# Altium PCB PCB1.PcbDoc
Units mil, origin at the board's own origin, x right, y up, seen from the top; angles counter-clockwise.
Board outline 3157.64 x 2047.03 mil, 2 copper layers (Top Layer, Bottom Layer); 97 components, 115 nets, 448 pads, 179 vias.
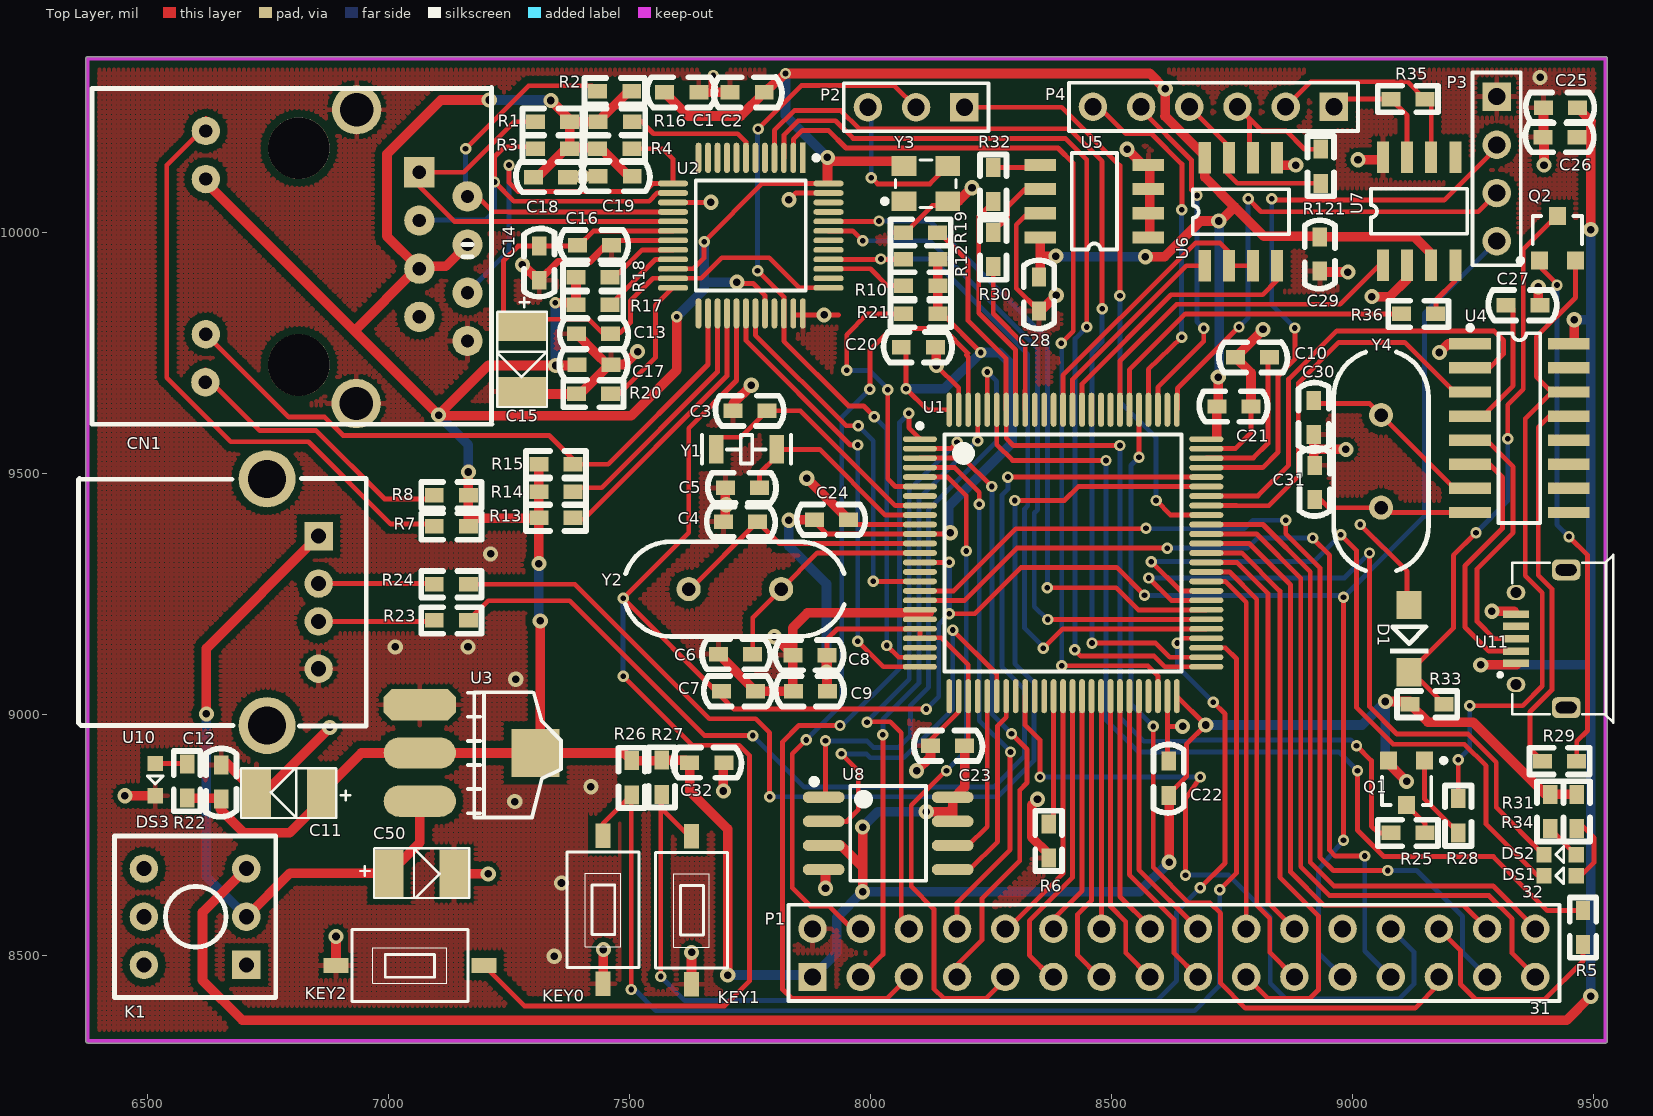
[diagram p0: Top Layer view]
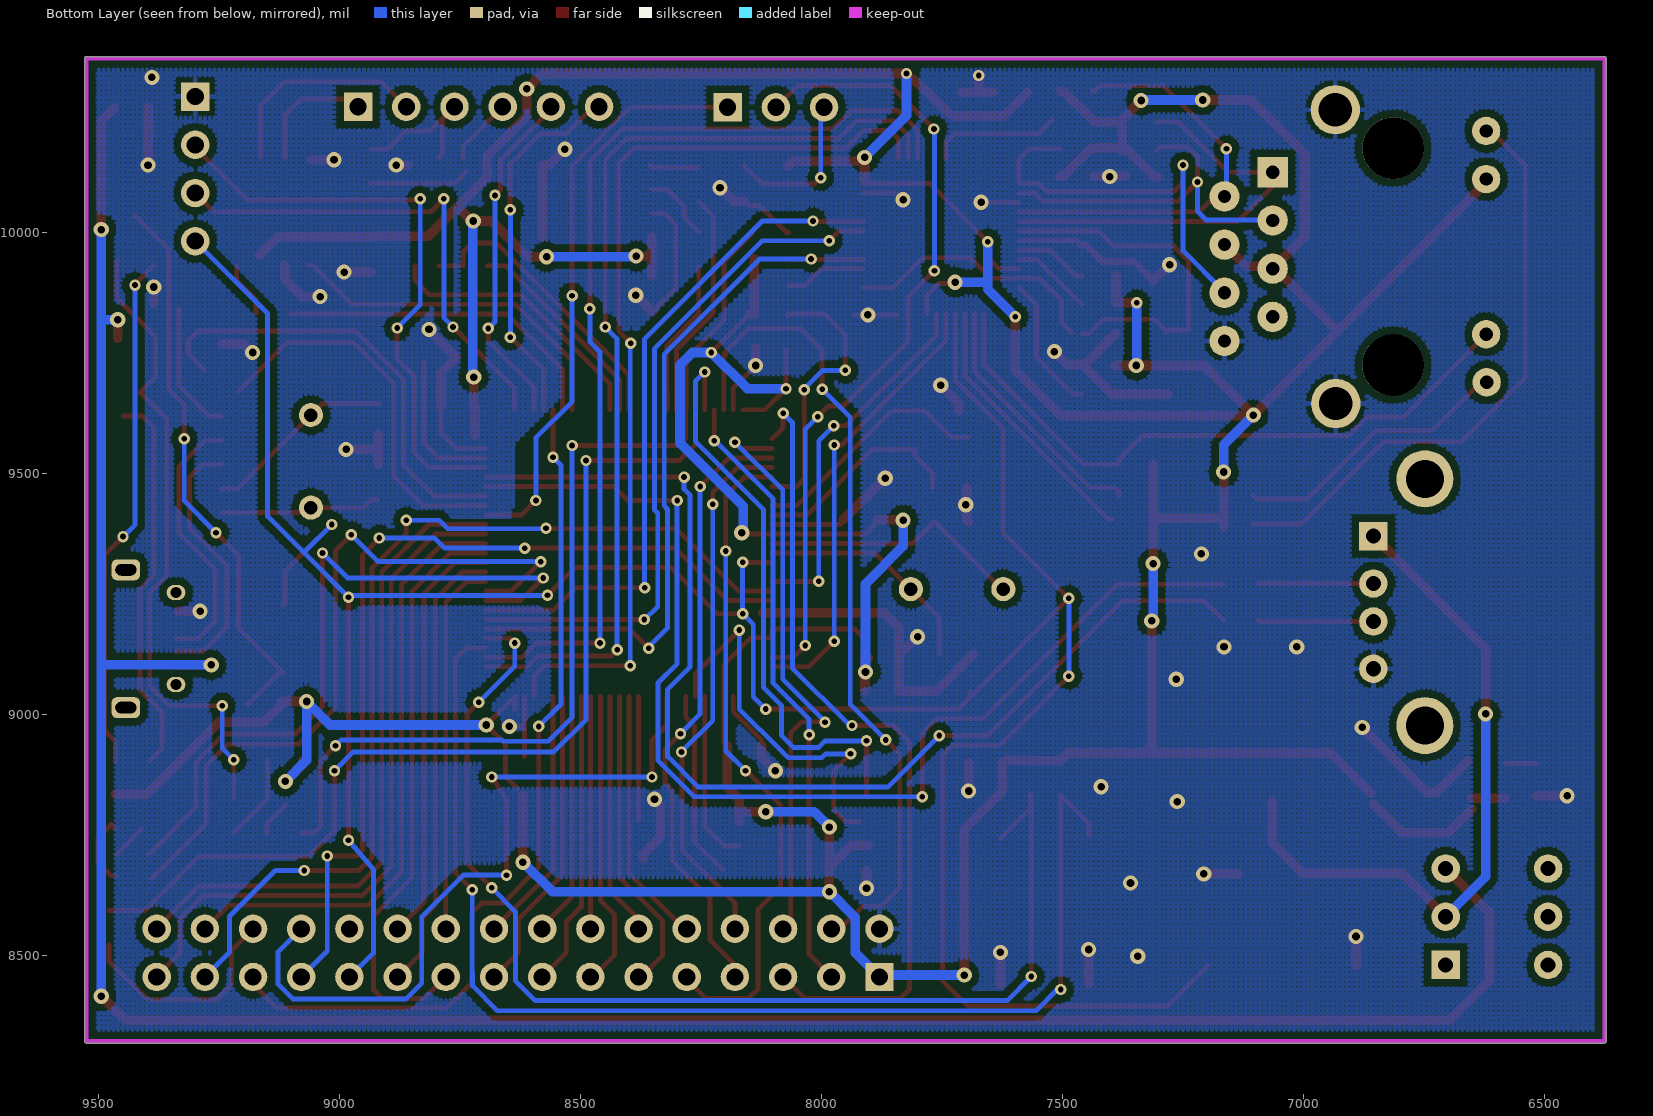
[diagram p1: Bottom Layer view, seen from below]

## Layer stack, top to bottom
Top Solder: solder mask 0.4, Solder Resist, Dk 3.5
Top Layer: signal copper 1.4
Dielectric 1: dielectric 12.6, FR-4, Dk 4.8
Bottom Layer: signal copper 1.4
Bottom Solder: solder mask 0.4, Solder Resist, Dk 3.5

## Board outline
6371.98,8322 6371.98,10358 cw(c6376,10358) 6372.28,10359.5 cw(c6376,10361) 6376,10365.01 9525.61,10365.01 cw(c9525.61,10361) 9529.62,10361 cw(c9525.61,10361) 9529.33,10359.5 cw(c9525.61,10358) 9529.62,10358 9529.62,8322 cw(c9525.61,8322) 9525.61,8317.99 6376,8317.99 cw(c6376,8322)

## Design rules (kind name [scope] priority, off if disabled: settings)
Clearance Clearance_GND [InPolygon] p1: gap=15
Clearance [All] p2: gap=10
PolygonConnect PolygonConnect_VIA [IsVia] p1: connectstyle=Direct reliefconductorwidth=10 reliefentries=4 polygonreliefangle="90 Angle" airgapwidth=10
PolygonConnect [All] p2: connectstyle=Relief reliefconductorwidth=10 reliefentries=4 polygonreliefangle="90 Angle" airgapwidth=10
RoomDefinition Sheet1 [InComponentClass('Sheet1')] p1: confinementstyle=ConfineIn formatcopy=TRUE lockcomponents=FALSE outline 0,0 2000,0 2000,1000 0,1000
RoutingVias [All] p1: holewidth=28 width=50 viastyle="Through Hole" minholewidth=28 minwidth=50 maxholewidth=28 maxwidth=50
SolderMaskExpansion [All] p1: expansion=4
UnpouredPolygon [All] p1: allowunpoured=FALSE
Width [All] p1: maxlimit=50 minlimit=8 preferedwidth=10
29 further rules are at their usual default settings.

## Components (designator, comment, footprint, x,y, rotation, side; value= is the part's Value field where it differs from the comment)
C1 "104" 0603C 7644,10291 r180 top
C2 "104" 0603C 7709,10291 r0 top
C3 "6pF" 0603C 7786,9630 r180 top
C4 "20pF" 0603C 7695,9400 r0 top
C5 "6pF" 0603C 7770,9470 r180 top
C6 "20pF" 0603C 7685,9125 r0 top
C7 "103p" 0603C 7762,9048 r180 top
C8 "104" 0603C 7910,9123 r180 top
C9 "104" 0603C 7911,9048 r180 top
C10 "2.2uF" 0603C 8758,9741 r0 top
C11 "10uF" 1206C 6861,8837 r180 top
C12 "104" 0603C 6653,8895 r270 top
C13 "104" 0603C 7390,9790 r0 top
C14 "103" 0603C 7313,9901 r90 top
C15 "106" 1206C 7277,9805 r270 top
C16 "104" 0603C 7463,9974 r180 top
C17 "104" 0603C 7462,9726 r180 top
C18 "104" 0603C 7372,10115 r180 top
C19 "106" 0603C 7435,10117 r0 top
C20 "104" 0603C 8135,9762 r180 top
C21 "104" 0603C 8790,9639 r180 top
C22 "104" 0603C 8619,8903 r270 top
C23 "104" 0603C 8125,8935 r0 top
C24 "104" 0603C 7955,9404 r180 top
C25 "104" 0603C 9468,10259 r180 top
C26 "104" 0603C 9467,10198 r180 top
C27 "104" 0603C 9390,9849 r180 top
C28 "104" 0603C 8350,9908 r270 top
C29 "104" 0603C 8933,9991 r270 top
C30 "22" 0603C 8920,9581 r90 top
C31 "22" 0603C 8922,9446 r90 top
C32 "104" 0603C 7625,8900 r0 top
C50 "Cap2" 1206C 7001,8670 r0 top
CN1 "J0011D21B" RJ45-12 6480,9919 r270 top
D1 "1N4148" DIODE_SOP 9118,9227 r270 top
DS1 "LED" SMDLED-0603 9465,8665 r180 top
DS2 "LED" SMDLED-0603 9465,8709 r180 top
DS3 "LED" SMDLED-0603 6516,8898 r270 top
K1 "BUTTON" BTN8.5*8.5 6705,8480 r180 top
KEY0 "KEY_M" KEY_SOP3625 7445,8441 r90 top
KEY1 "KEY_M" KEY_SOP3625 7629,8440 r90 top
KEY2 "KEY_M" KEY_SOP3625 6891,8479 r0 top
P1 "TFT" HDR2X16 7880,8455 r0 top
P2 "Header 3" HDR1X3 8195,10260 r180 top
P3 "SW" HDR1X4 9300,10282 r270 top
P4 "Header 6" HDR1X6 8962,10261 r180 top
Q1 "PNP S8550" SOT-23R 9113,8863 r180 top
Q2 "S8050" SOT-23R 9426,9983 r0 top
R1 "49R9" 0603R 7305,10230 r0 top
R2 "49R9" 0603R 7434,10293 r0 top
R3 "49R9" 0603R 7305,10174 r0 top
R4 "49R9" 0603R 7505,10174 r180 top
R5 "10K" 0603R 9479,8522 r90 top
R6 "10K" 0603R 8370,8702 r90 top
R7 "110R" 0603R 7095,9390 r0 top
R8 "110R" 0603R 7095,9455 r0 top
R10 "2K2" 0603R 8140,9890 r180 top
R12 "2K2" 0603R 8140,9945 r180 top
R13 "2K2" 0603R 7383,9408 r180 top
R14 "2K2" 0603R 7383,9462 r180 top
R15 "2K2" 0603R 7383,9519 r180 top
R16 "2K2" 0603R 7435,10230 r0 top
R17 "2K2" 0603R 7460,9850 r180 top
R18 "2K2" 0603R 7460,9907 r180 top
R19 "10K" 0603R 8069,10000 r0 top
R20 "4.87k" 0603R 7390,9665 r0 top
R21 "10K" 0603R 8140,9831 r180 top
R22 "330" 0603R 6582,8826 r90 top
R23 "22R" 0603R 7095,9195 r0 top
R24 "22R" 0603R 7095,9270 r0 top
R25 "1K" 0603R 9151,8754 r180 top
R26 "10K" 0603R 7505,8833 r90 top
R27 "10K" 0603R 7567,8834 r90 top
R28 "1K" 0603R 9220,8825 r270 top
R29 "1K" 0603R 9466,8903 r180 top
R30 "4.7K" 0603R 8255,10000 r270 top
R31 "1K" 0603R 9411,8834 r270 top
R32 "4.7K" 0603R 8255,10135 r270 top
R33 "10K" 0603R 9191,9021 r180 top
R34 "1K" 0603R 9466,8834 r270 top
R35 "120R" 0603R 9151,10277 r180 top
R36 "0R" 0603R 9102,9831 r0 top
R121 "120R" 0603R 8935,10173 r270 top
U1 "STM32F107VCT6" LQFP100_N 8400,9335 r0 top locked
U2 "DP83848CVV" LQFP48 7860,10155 r0 top
U3 "AMS1117-3.3" AMS1117 7065,9020 r270 top
U4 "CH340G" SOP16M 9347,9594 r270 top
U5 "24C02" SOP-8 8577,9990 r180 top
U6 "SP3485" SOP-8 8694,9931 r90 top
U7 "TJA1050" SOP-8 9064,9932 r90 top
U8 "W25Q256" LC-SOP-8_208mil 8037,8753 r270 top
U10 "USB-A-90" USB_2 6855,9370 r0 top
U11 "USB-B(Mini)" USB_AB 9444,9157 r270 top
Y1 "32.768KHz" XTAL3215 7680,9550 r0 top
Y2 "25MHz" XTAL_US 7815,9260 r180 top
Y3 "50Mhz" XTAL3225 8070,10065 r0 top
Y4 "12MHz" XTAL_US 9060,9429 r90 top

## Footprints (in the part's own frame and the unit in brackets; to place one, negate y for a bottom-side part, rotate by r counter-clockwise, add the part's x,y. Pads: shape width x height; smd on the part's side, far side on the other; paste and mask are expansions set on the pad)
0603C [mm]
  rect 1x0.762 smd: 1(0,0) 2(1.8,0)
  silkscreen extent -0.87,-0.8 2.73,0.8
0603R [mm]
  rect 1x0.762 smd: 1(0,0) 2(1.8,0)
  silkscreen extent -0.69,-0.7 2.49,0.7
1206C [mil]
  rect 60x100 smd: 1(0.13,-0.02) 2(135.13,-0.02)
  silkscreen extent -60,-51 167,52
AMS1117 [mil]
  oct 65x150 smd: 1(0.03,-0.06)
  oval 65x150 smd: 2(100.03,-0.06) 3(200.03,-0.06)
  rect 100x100 smd: 4(100.03,239.94)
  silkscreen extent -26,100 234,293
BTN8.5*8.5 [mm]
  rect 1.5x1.5 hole 0.8: 1(0,0)
  round 1.5 hole 0.8: 2(0,-2.54) 3(0,-5.08) 4(5.4,-5.08) 5(5.4,-2.54) 6(5.4,0)
  silkscreen extent -1.55,-6.79 6.95,1.71
DIODE_SOP [mm]
  rect 1.5x1.3 smd: 1(0,0) 2(3.556,0)
  silkscreen extent 1.14,-1.02 2.56,1.02
HDR1X3 [mm] "Connector; Header; 3 Position"
  rect 1.5x1.5 hole 0.9: 1(0,0)
  round 1.5 hole 0.9: 2(2.54,0) 3(5.08,0)
  silkscreen extent -1.27,-1.27 6.35,1.27
HDR1X4 [mm] "Connector; Header; 4 Position"
  rect 1.5x1.5 hole 0.9: 1(0,0)
  round 1.5 hole 0.9: 2(2.54,0) 3(5.08,0) 4(7.62,0)
  silkscreen extent -1.27,-1.27 8.89,1.27
HDR1X6 [mm] "Connector; Header; 6 Position"
  rect 1.5x1.5 hole 0.9: 1(0,0)
  round 1.5 hole 0.9: 2(2.54,0) 3(5.08,0) 4(7.62,0) 5(10.16,0) 6(12.7,0)
  silkscreen extent -1.27,-1.27 13.97,1.27
HDR2X16 [mm] "Connector; Header; 16x2 Position"
  rect 1.5x1.5 hole 0.9: 1(0,0)
  round 1.5 hole 0.9: 2(0,2.54) 3(2.54,0) 4(2.54,2.54) 5(5.08,0) 6(5.08,2.54) 7(7.62,0) 8(7.62,2.54) 9(10.16,0) 10(10.16,2.54) 11(12.7,0) 12(12.7,2.54) 13(15.24,0) 14(15.24,2.54) 15(17.78,0) 16(17.78,2.54) 17(20.32,0) 18(20.32,2.54) 19(22.86,0) 20(22.86,2.54) 21(25.4,0) 22(25.4,2.54) 23(27.94,0) 24(27.94,2.54) 25(30.48,0) 26(30.48,2.54) 27(33.02,0) 28(33.02,2.54) 29(35.56,0) 30(35.56,2.54) 31(38.1,0) 32(38.1,2.54)
  silkscreen extent -1.27,-1.27 39.37,3.81
KEY_SOP3625 [mm]
  rect 1.3x0.8 smd: 1(0,0) 2(7.8,0)
  silkscreen extent 0.85,-1.9 6.95,1.9
LC-SOP-8_208mil [mm]
  oval 0.6x2.2 smd: 1(-1.905,-3.4) 2(-0.635,-3.4) 3(0.635,-3.4) 4(1.905,-3.4) 5(1.905,3.4) 6(0.635,3.4) 7(-0.635,3.4) 8(-1.905,3.4)
  silkscreen extent -2.88,-4.05 2.5,2
LQFP48 [mm]
  rect 0.3x1.6 smd: 1(0,0)
  oval 0.3x1.6 smd: 2(-0.5,0) 3(-1,0) 4(-1.5,0) 5(-2,0) 6(-2.5,0) 7(-3,0) 8(-3.5,0) 9(-4,0) 10(-4.5,0) 11(-5,0) 12(-5.5,0) 25(-5.5,-8.2) 26(-5,-8.2) 27(-4.5,-8.2) 28(-4,-8.2) 29(-3.5,-8.2) 30(-3,-8.2) 31(-2.5,-8.2) 32(-2,-8.2) 33(-1.5,-8.2) 34(-1,-8.2) 35(-0.5,-8.2) 36(0,-8.2)
  oval 1.6x0.3 smd: 13(-6.85,-1.35) 14(-6.85,-1.85) 15(-6.85,-2.35) 16(-6.85,-2.85) 17(-6.85,-3.35) 18(-6.85,-3.85) 19(-6.85,-4.35) 20(-6.85,-4.85) 21(-6.85,-5.35) 22(-6.85,-5.85) 23(-6.85,-6.35) 24(-6.85,-6.85) 37(1.35,-6.85) 38(1.35,-6.35) 39(1.35,-5.85) 40(1.35,-5.35) 41(1.35,-4.85) 42(1.35,-4.35) 43(1.35,-3.85) 44(1.35,-3.35) 45(1.35,-2.85) 46(1.35,-2.35) 47(1.35,-1.85) 48(1.35,-1.35)
  silkscreen extent -5.65,-7 0.82,0.12
LQFP100_N [mm] "Thin QFP, 100-Leads, Body 14x14mm, Pitch 0.5mm, IPC Medium Density"
  oval 1.8x0.3 smd: 1(-7.55,6) 2(-7.55,5.5) 3(-7.55,5) 4(-7.55,4.5) 5(-7.55,4) 6(-7.55,3.5) 7(-7.55,3) 8(-7.55,2.5) 9(-7.55,2) 10(-7.55,1.5) 11(-7.55,1) 12(-7.55,0.5) 13(-7.55,0) 14(-7.55,-0.5) 15(-7.55,-1) 16(-7.55,-1.5) 17(-7.55,-2) 18(-7.55,-2.5) 19(-7.55,-3) 20(-7.55,-3.5) 21(-7.55,-4) 22(-7.55,-4.5) 23(-7.55,-5) 24(-7.55,-5.5) 25(-7.55,-6) 51(7.55,-6) 52(7.55,-5.5) 53(7.55,-5) 54(7.55,-4.5) 55(7.55,-4) 56(7.55,-3.5) 57(7.55,-3) 58(7.55,-2.5) 59(7.55,-2) 60(7.55,-1.5) 61(7.55,-1) 62(7.55,-0.5) 63(7.55,0) 64(7.55,0.5) 65(7.55,1) 66(7.55,1.5) 67(7.55,2) 68(7.55,2.5) 69(7.55,3) 70(7.55,3.5) 71(7.55,4) 72(7.55,4.5) 73(7.55,5) 74(7.55,5.5) 75(7.55,6)
  oval 0.3x1.8 smd: 26(-6,-7.55) 27(-5.5,-7.55) 28(-5,-7.55) 29(-4.5,-7.55) 30(-4,-7.55) 31(-3.5,-7.55) 32(-3,-7.55) 33(-2.5,-7.55) 34(-2,-7.55) 35(-1.5,-7.55) 36(-1,-7.55) 37(-0.5,-7.55) 38(0,-7.55) 39(0.5,-7.55) 40(1,-7.55) 41(1.5,-7.55) 42(2,-7.55) 43(2.5,-7.55) 44(3,-7.55) 45(3.5,-7.55) 46(4,-7.55) 47(4.5,-7.55) 48(5,-7.55) 49(5.5,-7.55) 50(6,-7.55) 76(6,7.55) 77(5.5,7.55) 78(5,7.55) 79(4.5,7.55) 80(4,7.55) 81(3.5,7.55) 82(3,7.55) 83(2.5,7.55) 84(2,7.55) 85(1.5,7.55) 86(1,7.55) 87(0.5,7.55) 88(0,7.55) 89(-0.5,7.55) 90(-1,7.55) 91(-1.5,7.55) 92(-2,7.55) 93(-2.5,7.55) 94(-3,7.55) 95(-3.5,7.55) 96(-4,7.55) 97(-4.5,7.55) 98(-5,7.55) 99(-5.5,7.55) 100(-6,7.55)
  silkscreen extent -7.67,-6.25 6.25,6.82, body extent -7,-7 7,7, height 1.6
RJ45-12 [mm]
  round 3.25 hole 3.25: 0(-6.502,8.484) 0(4.928,8.484)
  rect 1.6x1.6 hole 0.7: 1(-5.232,14.834)
  round 1.6 hole 0.7: 2(-3.962,17.374) 3(-2.692,14.834) 4(-1.422,17.374) 5(-0.152,14.834) 6(1.118,17.374) 7(2.388,14.834) 8(3.658,17.374)
  round 1.5 hole 0.7: 9(-7.412,3.581) 10(-4.877,3.581) 11(3.302,3.581) 12(5.838,3.556)
  round 2.6 hole 1.75: 13(-8.532,11.532) 14(6.958,11.506)
  silkscreen extent -9.7,-2.41 8.05,18.67
SMDLED-0603 [mil]
  rect 32x32 smd: 1(0,0) 2(66.93,0)
  silkscreen extent 26,-17 42,17
SOP16M [mm]
  rect 0.6x2.2 smd: 1(-4.445,-2.6) 2(-3.175,-2.6) 3(-1.905,-2.6) 4(-0.635,-2.6) 5(0.635,-2.6) 6(1.905,-2.6) 7(3.175,-2.6) 8(4.445,-2.6) 9(4.445,2.6) 10(3.175,2.6) 11(1.905,2.6) 12(0.635,2.6) 13(-0.635,2.6) 14(-1.905,2.6) 15(-3.175,2.6) 16(-4.445,2.6)
  silkscreen extent -5.42,-2.72 5,1.1
SOP-8 [mil]
  rect 65x25 smd: 1(0,0) 2(0,-50) 3(0,-100) 4(0,-150) 5(224.41,-150) 6(224.41,-100) 7(224.41,-50) 8(224.41,0)
  silkscreen extent 65,-175 159,25
SOT-23R [mm]
  rect 0.9x0.95 smd: 1(0.95,-1.048) 2(-0.95,-1.048) 3(0,1.302)
  silkscreen extent -2.07,-1.17 1.3,1.3
USB_2 [mm]
  round 3 hole 2: 0(-2.718,-9.986) 0(-2.718,3.018)
  rect 1.5x1.5 hole 0.8: 1(0,0)
  round 1.5 hole 0.8: 2(0,-2.5) 3(0,-4.5) 4(0,-6.989)
  silkscreen extent -12.65,-10.01 2.51,3.04
USB_AB [mm]
  rect 0.4x1.35 smd: 1(1.3,-2.642) 2(0.65,-2.642) 3(0,-2.642) 4(-0.65,-2.642) 5(-1.3,-2.642)
  oval 0.8x1 hole 0.6: 6(-2.438,-2.642) 9(2.413,-2.642)
  rrect50% 1.1x1.5 hole 0.6 slot 1.1 at 90 deg: 7(-3.632,0) 8(3.632,0)
  silkscreen extent -4.42,-3.58 4.42,2.49
XTAL3215 [mm]
  rect 0.75x1.5 smd: 1(0,0) 2(3.2,0)
  silkscreen extent -0.74,-0.75 3.94,0.75
XTAL3225 [mm]
  rect 1.3x1.05 smd: 1(0,0) 2(2.3,0) 3(2.3,1.85) 4(0,1.85)
  silkscreen extent -1.14,-0.33 2.74,2.17
XTAL_US [mil]
  round 50 hole 28: 1(0,0) 2(192.13,0)
  silkscreen extent -131,-98 323,98

## Part data
C1 C2 C3 C4 C5 C6 C7 C8 C9 C10 C12 C13 C14 C16 C17 C18 C19 C20 C21 C22 C23 C24 C25 C26 C27 C28 C29 C30 C31 C32: library part C
C11 C15: library part Cap2, "Capacitor"
C50: "Capacitor"
D1: library part D
P1: library part "Header 16X2", "Header, 16-Pin, Dual row"
P2: "Header, 3-Pin"
P3: library part "Header 4", "Header, 4-Pin"
P4: "Header, 6-Pin"
Q1: library part PNP, "8550/BCW68"
Q2: library part NPN, "8050/BCW846/BCW847"
R1 R2 R3 R4 R5 R6 R7 R8 R10 R12 R13 R14 R15 R16 R17 R18 R19 R20 R21 R22 R23 R24 R25 R26 R27 R28 R29 R30 R31 R32 R33 R34 R35 R36 R121: library part R
U1: library part STM32F103VBT6, "STM32 ARM-based 32-bit MCU with 64 Kbytes Flash, 100-pin LQFP, Industrial Temperature"
U3: library part AMS1117
U4: "USB2UART"
U5: library part 24C256, "EEPROM"
U6: library part MAX3485
U7: library part SN65HVD230D
U8: library part W25Q128, "W25Q128"
U10: library part USB_A_90
U11: library part USB5
Y1: library part XTAL, "普通晶振"
Y2 Y4: library part XTAL, "Crystal Oscillator"
Y3: library part XTAL_3225, "3225贴片无源晶振"

## Via types
v1: diameter 23.62, hole 11.81, Top Layer to Bottom Layer, 105 vias
v2: diameter 31.5, hole 15.75, Top Layer to Bottom Layer, 74 vias

## Nets (pads, with @x,y where several pads share a name; then routed paths per layer and width w, separated by ;. In a path a pad name is that pad's centre, name@x,y a point inside that pad or via, vN(x,y) a via of type N, cw(c..) or ccw(c..) an arc to the next point about the centre after c; other vN are vias at no path point)
3V3: C1.2 C2.2 C8.1 C9.1 C11.1 C12.2 C17.2 C18.2 C19.2 C20.2 C21.2 C22.2 C23.2 C24.2 C28.1 C29.1 C32.1 CN1.4 CN1.5 CN1.10 P1.1 Q1.1 R1.2 R2.2 R3.2 R4.2 R7.2 R8.2 R10.1 R12.1 R13.2 R14.2 R15.2 R16.1 R17.2 R18.2 R21.1 R22.1 R26.2 R27.2 R31.1 R33.2 R34.1 U1.11 U1.21 U1.22 U1.28 U1.50 U1.75 U1.100 U2.22 U2.32 U2.48 U3.2 U3.4 U5.8 U6.8 U7.3 U8.3 U8.7 U8.8 Y3.4 | length 15669.9
  Top Layer w10: U2.22 7632.32,9924.68 7655,9947.37 v1(7655,9981) 7775.85,10101.85 U2.48 ; v2(7723,9897) 7725.81,9894.19 7756.81,9894.19 7781.26,9869.74 U2.32 ; C24.2@7882,9403 7882,9402.13 7909.76,9374.37 U1.11 v2@8174.37,9374.37 ; C8.1@7910,9134 7910,9155.68 7931.52,9177.2 ; 7931.52,9177.52 U1.21 8102.76,9159.06 8146.94,9159.06 8203.15,9102.85 U1.28 8203.15,8942.28 C23.2 ; C20.2@8074,9757 v1(8074,9676) 8117.76,9632.24 U1.100 ; R21.1@8149.25,9831 v1(8229.25,9751) ; C22.2@8631.05,8845.53 8656,8870.48 8656,8938 v2(8696,8978) U1.50 U1.50@8636.22,9009.65
  Top Layer w20: R22.1 C12.2@6651.13,8826 ; CN1.10@6621,10104 6929,9796 ; 6651,8803 6700,8754 6795,8754 C11.1@6854.97,8813.97 ; C11.1 6943.82,8919.97 U3.2 U3.4 ; CN1.5@7064,9926 CN1.5@7081,9926 ; CN1.4 7119,9930 CN1.5@7059,9930 ; R7.2 R8.2 v2(7165.87,9503) ; 7176.54,9407 R13.2@7312.13,9407 ; v2(7209,10275) 7109,10275 6997,10163 6997,9992 CN1.5@7059,9930 ; C18.2 7309.03,10115 7368.03,10174 R3.2@7371.87,10174 ; v2(7312.13,9312.87) R13.2@7312.13,9407 ; R13.2 R13.2@7312.13,9407 ; R13.2@7312.13,9416 R14.2 R15.2 ; v2(7315,9194) 7315,8938.03 7319,8934.03 U3.4 ; v2(7337,10274) 7375.87,10235.13 R1.2 ; v1(7346,9854) 7389.13,9854 R18.2@7389.13,9910 ; v2(7346.98,9724) 7207,9724 v2(7104,9621) ; v2@7348.98,9724 C17.2@7391.13,9724 ; R4.2@7430.13,10176 R3.2@7375.87,10176 ; R4.2 7441,10174 7498,10117 C19.2 ; R2.2 7498,10293 R16.1 R1.2 ; R27.2@7566,8903.87 R26.2 7488.9,8919.97 U3.4 ; R27.2 7617.13,8904.87 C32.1@7623.5,8898.5 ; C1.2 7622.13,10242 7730.87,10242 C2.2 v1(7824,10330) 8580,10330 v2(8612,10298) 8612,10241.9 8611.53,10241.43 8694,10158.96 U6.8 8694,10115.01 8756.01,10053.01 ; v1(7598,9825) 7598,9714 7503.87,9619.87 7105.13,9619.87 v2(7104,9621) ; C32.1 7625,8841 7704,8762 v2(7704,8459) ; v2(7831,9403) 7832,9404 C24.2 ; U8.3 7939,8728 7984,8683 ; v2(7909,9088) 7909,9110 7903,9116 C8.1 C9.1@7910,9049 ; 7911,10110.22 7911,10140 ; v2(7911,10156) 7911,10140 ; v2(7984,8632) 7984,8683 ; v2(7984,8766) 7984,8683 ; Y3.4 8059.83,10148 7919,10148 7911,10140 ; v2(8116,8798) 8163.86,8798 8167.86,8802 ; R12.1 R10.1 R21.1 R21.1@8149.25,9831 ; U8.7 8170.86,8823.86 8195.87,8848.87 C23.2 ; C28.1@8352.59,9910.59 8352.59,9951 ; U5.8 8352.59,9951 ; v2(8385,9951) 8352.59,9951 ; v2(8570.75,9949.75) 8610.51,9949.75 8684.76,10024 v2(8723,10024) 8727,10024 8756.01,10053.01 ; C22.2 8620,8831.13 v2(8620,8693) ; 8719.13,9578 C21.2 8722,9641.87 v2(8722,9700) ; C29.1@8932,9992 8817.01,9992 8756.01,10053.01 ; C29.1 9129,9991 U7.3@9166.5,9953.5 ; v2(9069,9026.75) 9120.13,9026.75 R33.2 9157.13,8984 9251.16,8984 9401.16,8834 R31.1 R34.1 ; Q1.1 9075.6,8898.4 v2(9113,8861) ; 6929,9796 v2(7104,9621) ; 6929,9796 7058,9925 CN1.5 CN1.5@7059,9930 ; R3.2@7371.87,10174 R3.2 7375.87,10170 R3.2@7371.87,10174 ; R3.2@7371.87,10174 7369.87,10176 R3.2@7375.87,10176 ; R3.2@7375.87,10176 R1.2
  Bottom Layer w10: CN1.5@7064,9909.24 CN1.5
  Bottom Layer w20: v2(7104,9621) 7165.87,9559.13 v2(7165.87,9503) ; v2(7209,10275) v2@7336,10275 ; v2(7312.13,9312.87) 7312.13,9196.87 v2(7315,9194) ; v2@7346,9724.98 v1(7346,9854) ; v1(7598,9825) 7655,9882 7655,9892 ; v1(7655,9981) 7655,9892 ; v2(7704,8459) 7876,8459 P1.1 7930.47,8505.47 7930.47,8578.47 v2(7984,8632) 8559,8632 v2(8620,8693) ; v2(7723,9897) 7660,9897 7655,9892 ; v1(7824,10330) 7824,10243 v2(7911,10156) ; v2(7831,9403) 7831,9349 7909,9271 v2(7909,9088) ; v2(7984,8766) 8016,8798 v2(8116,8798) ; v1(8074,9676) 8154.25,9676 v1(8229.25,9751) 8268,9751 8294,9725 8294,9563 8163,9432 8163,9380 v2(8166,9377) ; v2(8385,9951) 8386.25,9949.75 v2(8570.75,9949.75) ; v2(8696,8978) 9020.25,8978 v2(9069,9026.75) 9069,8905 v2(9113,8861) ; v2(8723,10024) 8723.81,10023.19 v2@8723.81,9700
5V: C25.1 C26.1 K1.3 U4.16 U11.1 | length 5435.8
  Top Layer w20: K1.3 6614,8589 6614,8448 6696.53,8365.47 9445.47,8365.47 v2(9495,8415) ; v2(9267,9102.82) U11.1@9341,9102.82 ; U4.16@9461,9780.64 v2(9461,9819) ; C25.1 9496,10231 9495,10230 v2(9495,10006)
  Bottom Layer w20: v2(9267,9102.82) 9492,9102.82 ; v2(9461,9819) 9495,9819 ; 9491.96,9105.78 9495,9105.82 ; v2(9495,8415) 9495,9105.82 ; v2(9495,10006) 9495,9819 ; 9495,9105.82 9495,9819
"485 DIR": U1.88 U6.2 U6.3 | length 616.2
  Top Layer w10: 8399.68,9671.97 8399.68,9703.57 8639.68,9943.57 8640,9943.57 8647.43,9951 8647.79,9951 8675.29,9978.5 8725.5,9978.5 8744,9960 U6.2 U6.3 ; U1.88 8400,9671.97
"485 RX": U1.87 U6.1 | length 434.7
  Top Layer w10: U1.87 8419.68,9695.28 ; 8420,9695.28 8655.72,9931 U6.1
"485 TX": U1.86 U6.4 | length 577.7
  Top Layer w10: U1.86 8439.37,9686.37 8624,9871 8814,9871 8844,9901 U6.4
485A: P4.3 R121.1 U6.6 | length 315.9
  Top Layer w10: P4.3@8762,10238 P4.3 8812,10211 8863,10211 8901,10173 R121.1 ; 8787,10236 8787,10162.41 U6.6
485B: P4.4 R121.2 U6.7 | length 347.1
  Top Layer w10: P4.4 8744,10179 U6.7 ; U6.7@8737.5,10126.5 8761.87,10102.13 R121.2
BOOT0: R19.2 R25.2 U1.94 | length 2064.9
  Top Layer w10: R19.2@8142.87,10000 8203,9939.87 8203,9817 8281.26,9738.74 U1.94@8281.26,9632.24 ; U1.94@8281.89,9663.05 U1.94 8281.89,9573.11 8297,9558 v1(8518,9558) ; v1(9009,8935) 9040,8904 9040,8768 9054,8754 R25.2
  Bottom Layer w10: v1(8518,9558) 8518,8994 8567.75,8944.25 8660.74,8944.25 8663.48,8947 8997,8947 v1(9009,8935)
"CAN RX": R36.1 U1.81 | length 694.9
  Top Layer w10: U1.81 8537.8,9714.8 8654,9831 R36.1
"CAN TX": U1.82 U7.1 | length 729.4
  Top Layer w10: U1.82 8518.11,9733.48 8635.63,9851 8975,9851 9056,9932 U7.1
CANH: P4.1 R35.2 U7.7 | length 259.4
  Top Layer w10: P4.1 8978,10277 R35.2 9114,10243.13 U7.7
CANL: P4.2 R35.1 U7.6 | length 451.4
  Top Layer w10: P4.2 8914,10313 9115,10313 R35.1 9164,10264 U7.6
"CH340 D+": U4.5 U11.3 | length 559.9
  Top Layer w10: U4.5 9279,9569 9334,9514 9334,9377 9259.25,9302.25 9259.25,9192.75 9295,9157 U11.3
"CH340 D-": U4.6 U11.2 | length 548.2
  Top Layer w10: U4.6 9285,9519 9312,9492 9312,9386 9234,9308 9234,9181.3 9283.89,9131.41 U11.2
FCS: U1.96 U8.1 | length 1225.6
  Top Layer w10: U8.1 7907,8831.86 v1(7907,8945) ; U1.96 v1(8242.52,9710.52)
  Bottom Layer w10: v1(7907,8945) 7993,8945 8006.81,8931.19 8058.19,8931.19 8083.57,8956.57 8083.57,9019 8120.81,9056.24 8120.81,9425.73 8262,9566.92 8262,9691.04 v1(8242.52,9710.52)
FMIOSI: U1.32 U8.5 | length 391.9
  Top Layer w10: U8.5@8205.5,8677.5 8264,8736 8264,8976 8281.89,8993.89 U1.32
FMISO: U1.31 U8.2 | length 809.7
  Top Layer w10: U8.2@7921,8778 7951.28,8778 7975,8801.72 7975,8883 v1(7940,8918) ; v1(8171,9175) 8262.2,9083.8 U1.31
  Bottom Layer w10: v1(7940,8918) 7991.72,8918 7999.72,8910 8069,8910 8126.19,8967.19 8127.11,8967.19 8171,9011.08 v1(8171,9175)
FSCK: U1.30 U8.6 | length 358
  Top Layer w10: U8.6@8171.86,8727 8202.52,8727 8242.52,8767 U1.30
GND: C1.1 C2.1 C3.2 C4.1 C5.2 C6.1 C7.1 C8.2 C9.2 C10.1 C11.2 C12.1 C13.1 C14.1 C15.2 C16.1 C17.1 C18.1 C19.1 C20.1 C21.1 C22.1 C23.1 C24.1 C25.2 C26.2 C27.1 C28.2 C29.2 C30.1 C31.2 C32.2 C50.2 CN1.8 CN1.13 CN1.14 DS3.2 KEY0.1 KEY1.1 KEY2.1 P1.2 P3.1 R6.1 R19.1 R20.1 U1.10 U1.19 U1.20 U1.27 U1.49 U1.74 U1.99 U2.15 U2.19 U2.35 U2.36 U2.47 U3.1 U4.1 U5.1 U5.2 U5.3 U5.4 U5.7 U6.5 U7.2 U7.8 U8.4 U10.4 U11.5 Y3.2 | length 5249.9
  Top Layer w10: C50.2 C50.2@7137.11,8669 ; C16.1@7469,9983.74 U2.19 ; U2.15 v2@7668.48,10062.48 ; v2(7831,10068) 7845.16,10082.16 U2.47 ; C9.2@7839.13,9049 C9.2 ; U2.35@7844.7,9829 v2(7904,9829) 7934,9829 ; C24.1@7960.94,9394.06 U1.10 ; R19.1 8072.47,10000 8128.47,10056 8151.55,10056 Y3.2 ; C23.1@8125,8947 8183.46,9005.46 U1.27 ; v2(8137,9724) 8183.46,9677.54 U1.99 ; C28.2 8303,9884.13 8303,10016 8327,10040 U5.7 ; C22.1@8616.54,8912 8616.54,8978 ; U1.49 8616.54,8978 ; v2(8648,8975) 8619.54,8975 8616.54,8978 ; U1.74 8757.54,9551.54 8790,9584 C21.1
  Top Layer w15: C14.1 7352,9940 7417.57,9940 7451.57,9974 C16.1
  Top Layer w20: v2(6453,8831) 6453.07,8831.07 DS3.2 ; C12.1@6658.94,8903.94 C11.2 6743.02,8837.02 v2@6878.5,8972.5 ; KEY2.1 v2(6891,8539) ; C50.2@7137.11,8669 v2(7207,8669) v2@7206.02,8669.98 ; v2(7278,9933) 7279,9933 C14.1@7312,9900 ; C15.2@7281.85,9665 R20.1 7397.9,9665 7458.9,9726 C17.1 7490,9726 v2(7517,9753) ; C18.1@7370,10117 C19.1 ; C13.1 7390.1,9790 7430.82,9749.28 7430.82,9749.18 C17.1@7454,9726 ; KEY0.1@7446,8442 v2(7446,8512) ; KEY1.1 v2(7629,8506) ; C1.1 C2.1 ; v1@7673,10325 v1(7674,10326) 7674,10293 ; C6.1 C7.1 C9.2 ; v2(7695,8841) C32.2@7695,8899.13 ; C4.1 7699.13,9404.13 C5.2 ; C3.2 7715.13,9645.13 v2(7753,9683) ; v2(7801,9161.13) C8.2 ; C9.2@7839.13,9049 C8.2 ; v2(7868,9490) 7869,9490 C24.1 ; v2(7907,8639) U8.4@7907,8674.14 ; v2(8096,8883) 8125,8912 C23.1 ; 8122,9210.67 7869.67,9210.67 7839.13,9180.13 C8.2 ; v2(8137,9724) C20.1@8137,9760 ; Y3.2 8183,10065 v2(8211,10093) ; v2(8347,8824) 8335,8812 8335,8744.9 8370,8709.9 R6.1 ; C28.2 8353.13,9837.13 v2(8386,9870) ; v2(8533,10173) 8566,10140 U5.4 ; U5.1@8580,9990 U5.4@8580,10140 ; C21.1 8790,9709 C10.1 v2@8815,9798 ; 8859.41,10140 v2(8883,10140) ; C31.2@8920,9518.87 C30.1 ; 8922,9550 v2(8987,9550) ; C29.2@8935.13,9918 v2(8991,9918) ; v2(9012,10151) U7.8@9058.59,10151 ; v2(9041,9867) 9078,9867 9114,9903 U7.2 ; v2(9181,9751) 9199,9769 U4.1 ; v2(9290,9214) U11.5@9336.46,9214 ; C27.1@9386,9853 v2(9386,9887) ; C26.2@9397.13,10199 C25.2 ; v2(9398,10140) C26.2@9398,10196.13
  other v2: 7344,8498 7359,8650 7262,8819 7420,8850 6878,8973 7264,9073 7014,9140 7165,9140 7212,9333 7701,9435 8815,9799 7669,10063 7402,10116 9390,10322
"IIC SCL": R30.2 U1.92 | length 324.5
  Top Layer w10: R30.2 8255,9832 8321.57,9765.43 8321.57,9671.97 ; U1.92 8321.26,9671.97
"IIC SDA": R32.2 U1.93 | length 475.9
  Top Layer w10: R32.2 8225,10034.13 8225,9833 8301.26,9756.74 U1.93@8301.26,9632.24
KEY1: KEY0.2 R26.1 U1.53 | length 2539
  Top Layer w10: KEY0.2 7445,8773 R26.1@7504,8832 ; v1(7504,8429) R26.1@7504,8832 ; R26.1 R26.1@7504,8832 ; U1.53 8736.85,9138.15 8760,9115 8760,8671 v1(8725,8636)
  Bottom Layer w10: v1(7504,8429) 7511,8429 7555,8385 8672.97,8385 8724.53,8436.56 8724.53,8462.5 8725,8462.97 v1@8725,8635.53 ; v1@8724.53,8636 v1@8725,8635.53 ; v1(8725,8636) v1@8725,8635.53
KEY2: KEY1.2 R27.1 U1.54 | length 2454.8
  Top Layer w10: v1(7565,8456) 7565,8826 7568,8829 7565,8832 R27.1 7567,8804 KEY1.2@7629,8742 ; v1(8637,9148) 8646.83,9157.83 U1.54 ; v1(8685,8640) 8736,8691 8736,9001 v1(8711.5,9025.5)
  Bottom Layer w10: v1(7565,8456) 7615,8406 8593.97,8406 8635.47,8447.5 8635.47,8590.47 v1(8685,8640) ; v1(8637,9148) 8637,9100 v1(8711.5,9025.5)
LED1: DS2.2 U1.58 | length 1480.1
  Top Layer w10: v1(8578,9283) 8624.43,9236.57 U1.58 ; v1(9036,9335) 9036,9016 9093,8959 9240.81,8959 9299,8900.81 9299,8807 DS2.2@9397,8709
  Bottom Layer w10: v1(8578,9283) 8984,9283 v1(9036,9335)
LED2: DS1.2 U1.59 | length 1528.2
  Top Layer w10: v1(8583,9317) 8643.74,9256.26 U1.59 ; v1@8975,9372 v1(8976,9373) 9009.19,9339.81 9009.19,9013.81 9085.04,8937.96 9233.04,8937.96 9278,8893 9278,8772 DS1.2@9390,8660
  Bottom Layer w10: v1(8583,9317) 8920,9317 v1(8976,9373)
MCO: P2.1 U1.67 | length 1216
  Top Layer w10: P2.1 8397,10260 8518,10139 v1(8518,9869) ; v1(8593,9444) 8623.26,9413.74 U1.67
  Bottom Layer w10: v1(8518,9869) 8518,9649 8593,9574 v1(8593,9444)
"MII MDC": U1.16 U2.31 | length 769
  Top Layer w10: U2.31 7761.58,9787 7949.58,9599 v1(7975,9599) ; v1@8006.06,9275.94 U1.16
  Bottom Layer w10: v1(7975,9599) 8006,9568 v1(8006,9276)
"MII MDIO": U1.25 U2.30 | length 936
  Top Layer w10: U2.30 7741.89,9776 7958.89,9559 v1(7974,9559) ; v1(7974,9152) 8027.22,9098.78 U1.25
  Bottom Layer w10: v1(7974,9152) v1(7974,9559)
"MII RXCLK": P2.2 U1.24 U2.34 | length 1664.4
  Top Layer w10: v1(7766,9921) 7820.63,9866.37 U2.34 7820.63,9774.37 7955,9640 7986,9640 v1(8008,9618) ; v1(7767,10215) 7857,10305 8050,10305 P2.2 ; v1(8034,9143) 8058.54,9118.46 U1.24
  Bottom Layer w10: v1(7766,9921) 7766,10214 v1(7767,10215) ; v1(8008,9618) 8034,9592 v1(8034,9143)
"MII RXD0": U1.56 U2.43 | length 1441.3
  Top Layer w10: U2.43 7963.58,10003.42 v1(7984,9983) ; v1@8368,9197.2 U1.56
  Bottom Layer w10: v1(7984,9983) 8123,9983 8347,9759 8347,9424.8 8340.19,9417.99 8340.19,9223.81 8367,9197 v1(8368,9197)
"MII RXD1": U1.57 U2.44 | length 1421.8
  Top Layer w10: U2.44 v1@8017.11,10023.11 ; v1(8367,9263) 8510,9263 8556.11,9216.89 U1.57
  Bottom Layer w10: v1(8018,10024) 8123,10024 8368,9779 8368,9263 v1(8367,9263)
"MII RXDV": R12.2 U1.55 U2.40 | length 1526.1
  Top Layer w10: U2.40 R12.2@8068.5,9944.37 ; v1(8359,9137) 8399.52,9177.52 U1.55
  Bottom Layer w10: v1(8022,9945) 8129,9945 8326.81,9747.19 8326.81,9432.89 8320.19,9426.27 8320.19,9178.81 8359,9140 v1(8359,9137)
"MII TXD0": U1.51 U2.3 | length 2036.6
  Top Layer w10: U2.3 7820.63,10202.63 ; 7821,10203 7850,10232 7927.74,10232 7964.27,10195.47 8404.96,10195.47 8449,10151.43 v1(8449,9804) ; v1(8424,9134) 8437,9121 8589,9121 8611.22,9098.78 U1.51
  Bottom Layer w10: v1(8424,9134) 8425,9135 8425,9780 v1(8449,9804)
"MII TXD1": U1.52 U2.4 | length 2055.5
  Top Layer w10: U2.4 7800.95,10211.95 7842,10253 7939.03,10253 7976.56,10215.47 8413.24,10215.47 8481,10147.72 v1(8481,9842) ; v1(8460,9148) 8592,9148 8621.54,9118.46 U1.52
  Bottom Layer w10: v1(8460,9148) 8460,9752 8481,9773 v1(8481,9842)
"MII TXEN": U1.48 U2.2 | length 1957.7
  Top Layer w10: U2.2 7840.32,10193.32 7859,10212 7913,10212 7949.53,10175.47 8389.53,10175.47 8421,10144 8421,9795 v1(8396,9770) ; v1@8399,9101 8576,9101 8596.85,9080.15 U1.48
  Bottom Layer w10: v1(8396,9770) 8396.38,9770 8397.19,9769.19 v1(8397.19,9101.19)
NC: P1.24
NetC10_2: C10.2 U1.73 | length 311
  Top Layer w10: U1.73 8795,9531.85 ; 8795,9532.17 8825,9562.17 C10.2@8825,9733
NetC13_2: C13.2 C14.2 C15.1 C16.2 U2.18 U2.23 U2.37 | length 1313.4
  Top Layer w10: C15.1@7284.96,9797.87 7239,9797.87 7239,9942 7268.87,9971.87 C14.2 C16.2@7390.27,9971.87 ; C15.1@7284.98,9794.87 7310.11,9820 7415.9,9820 7445.9,9790 C13.2 ; C16.2@7392.13,9970 7425.56,10003.42 U2.18 ; 7481,9792 7502,9813 7502,9858 7549,9905 U2.23 7649,9905 7691.81,9947.81 7790.19,9947.81 7852.69,9885.31 U2.37
NetC27_2: C27.2 U4.4 | length 275.4
  Top Layer w10: U4.4 9270.97,9619 9334,9682.03 C27.2@9334,9842
NetC30_2: C30.2 U4.7 Y4.2 | length 400.5
  Top Layer w10: C30.2@8917,9645 9036.13,9645 9212.13,9469 U4.7
NetC31_1: C31.1 U4.8 Y4.1 | length 333.8
  Top Layer w10: C31.1 8934,9446 8951,9429 Y4.1 9070,9419 U4.8
NetC50_1: C50.1 K1.2 U3.3 U10.1 | length 1430.7
  Top Layer w20: v2(6622,9001) 6622,9137 U10.1 ; K1.2 6794.98,8669.98 C50.1 7064.94,8733.79 U3.3
  Bottom Layer w20: v2(6622,9001) 6622,8663 K1.2
NetCN1_1: CN1.1 R1.1 U2.17 | length 864.7
  Top Layer w10: CN1.1 7064,10096 7136.89,10023.11 U2.17 ; CN1.1@7064,10126 CN1.1@7064.5,10125.5 ; CN1.1@7070,10125 7156,10125 7261,10230 R1.1
NetCN1_2: CN1.2 R2.1 U2.16 | length 876
  Top Layer w10: v1(7160,10174) 7290.75,10304.75 7422.25,10304.75 R2.1 ; CN1.2 7184.11,10075 7216,10043.11 7249,10043.11 ; 7249,10042.8 7540,10042.8 U2.16 ; R2.1@7436,10293 R2.1@7438,10295
  Bottom Layer w10: v1(7160,10174) 7160,10079 CN1.2
NetCN1_3: CN1.3 R3.1 U2.14 | length 767.3
  Top Layer w10: R3.1@7305,10170 7297,10178 7241,10178 7220,10157 v1(7220,10105) 7260,10065 7527.2,10065 7541,10065 7558.16,10082.16 U2.14
  Bottom Layer w10: CN1.3@7064,10026 7201.67,10026 7220,10044.33 v1(7220,10105)
NetCN1_6: CN1.6 R4.1 U2.13 | length 835.8
  Top Layer w10: v1(7250,10140) 7250,10104 7269,10085 7532.3,10085 7549.15,10101.85 U2.13 7590.32,10152.68 7569,10174 R4.1
  Bottom Layer w10: CN1.6@7164,9876 7250,9962 v1(7250,10140)
NetCN1_9: CN1.9 R7.1 | length 1262.3
  Top Layer w10: CN1.9@6621,10236.83 6621,10221 6540,10140 6540,9699 6673,9566 6834,9566 7005,9395 R7.1@7105,9395
NetCN1_11: CN1.11 R15.1 U2.26 | length 1351.7
  Top Layer w10: CN1.11 6793,9617 6867.48,9617 6905.59,9578.9 7333.1,9578.9 7383,9529 R15.1 7456,9519 7663.15,9726.15 U2.26
NetCN1_12: CN1.12 R8.1 | length 614.4
  Top Layer w10: CN1.12@6625.17,9710 6620,9715.17 6620,9702 6733,9589 6850,9589 6992,9447 7097,9447 R8.1@7105,9455
NetD1_2: D1.2 Q2.3 R33.1 | length 1176.6
  Top Layer w10: R33.1 9125,9087 D1.2 9210,9179 9210,9330 v1(9257,9377) ; v1(9323,9572) 9323,9642.75 9354.88,9674.63 9354.88,9965.65 9423.49,10034.26 Q2.3
  Bottom Layer w10: v1(9257,9377) 9323,9443 v1(9323,9572)
NetDS1_1: DS1.1 R34.2 | length 150.7
  Top Layer w10: DS1.1 9474.21,8665 9502.07,8692.85 9502.07,8743.93 9474.43,8771.57 R34.2
NetDS2_1: DS2.1 R31.2 | length 76.9
  Top Layer w10: R31.2 9411,8762.24 9464.24,8709 DS2.1
NetDS3_1: DS3.1 R22.2 | length 64.9
  Top Layer w10: DS3.1 R22.2@6580.87,8898
NetP1_28: P1.28 R5.1 | length 468
  Top Layer w10: P1.28 9224.53,8510.47 9224.53,8440.47 9257,8408 9399,8408 9479,8488 R5.1
NetP2_3: P2.3 Y3.3 | length 328.1
  Top Layer w10: v1(8002,10114) 8015,10101 8123.72,10101 Y3.3
  Bottom Layer w10: P2.3 8002,10253 v1(8002,10114)
NetQ1_2: Q1.2 R28.2 | length 179
  Top Layer w10: Q1.2 9150.4,8823.73 R28.2
NetQ1_3: Q1.3 R25.1 | length 73.5
  Top Layer w10: Q1.3 9151,8773.74 R25.1
NetQ2_1: Q2.1 R28.1 U4.14 | length 1338.7
  Top Layer w10: R28.1 v1(9220,8906) ; v1(9244,9018) 9353.66,9018 9394.6,9058.94 9394.6,9252.11 9359,9287.72 9359,9614 9414,9669 9382,9701 9382,9783.48 9463.52,9865 9463.52,9939.63 Q2.1@9461.4,9941.74
  Bottom Layer w10: v1(9220,8906) 9244,8930 v1(9244,9018)
NetQ2_2: Q2.2 R29.1 | length 1081.3
  Top Layer w10: Q2.2@9386.6,9931.74 v1@9427.34,9891 ; v1(9450,9369) 9488.53,9330.47 9488.53,8966.53 9466,8944 R29.1
  Bottom Layer w10: v1(9425,9891) 9425,9394 v1(9450,9369)
NetR6_2: R6.2 U1.37 | length 257.8
  Top Layer w10: R6.2@8380.32,8780 U1.37
NetR10_2: R10.2 U2.39 | length 170.4
  Top Layer w10: U2.39 8000.32,9924.68 8035,9890 R10.2
NetR13_1: R13.1 U2.28 | length 559.4
  Top Layer w10: R13.1@7396,9405 7405,9405 7702.52,9702.52 U2.28
NetR14_1: R14.1 U2.27 | length 531.2
  Top Layer w10: R14.1@7383,9454 R14.1@7383,9461 ; R14.1 7391.5,9470.5 7442.5,9470.5 7682.84,9710.84 U2.27
NetR16_2: R16.2 U2.7 | length 274.4
  Top Layer w10: R16.2@7520,10235 7550,10205 7725,10205 7741.89,10188.11 U2.7
NetR17_1: R17.1 U2.21 | length 169.3
  Top Layer w10: R17.1 7554.05,9944.05 7554.53,9944.05 ; 7554.53,9944.37 U2.21
NetR18_1: R18.1 U2.20 | length 152.7
  Top Layer w10: R18.1@7460,9910 7472.95,9910 7527,9964.05 U2.20
NetR20_2: R20.2 U2.24 | length 284.6
  Top Layer w10: R20.2 7479,9665 7554,9740 7554,9849 U2.24
NetR21_2: R21.2 U1.6 | length 577
  Top Layer w10: v1(7951,9714) 7951,9788 7994,9831 R21.2 ; v1(8036,9674) 8036,9489 8052.2,9472.8 U1.6 ; R21.2@8071.13,9826.13 R21.2@8071.13,9831
  Bottom Layer w10: v1@7951,9713 v1(7951,9714) 7997.92,9714 8036,9675.92 v1(8036,9674)
NetR23_1: R23.1 U10.3 | length 250.9
  Top Layer w10: U10.3@6845,9192.83 7092.83,9192.83 R23.1
NetR24_1: R24.1 U10.2 | length 248.4
  Top Layer w10: U10.2@6845,9271.57 R24.1@7093.43,9271.57
NetR29_2: R29.2 U4.13 | length 807.4
  Top Layer w10: R29.2 9369,8929.13 9369,9005.05 9414.6,9050.65 9414.6,9260.4 9386,9289 9386,9596 9409,9619 U4.13
NetR30_1: R30.1 U5.6 | length 148.9
  Top Layer w10: R30.1 8255,10001.24 8285,10031.24 8285,10054 8321,10090 U5.6
NetR32_1: R32.1 U5.5 | length 102.7
  Top Layer w10: R32.1 8350.59,10135 U5.5@8355.59,10140
NetR36_2: R36.2 U7.4 | length 116.4
  Top Layer w10: R36.2@9174,9832.13 9174,9860 9214,9900 U7.4
NRST: C7.2 D1.1 KEY2.2 P1.23 P3.4 U1.14 U2.29 | length 6276.6
  Top Layer w10: KEY2.2 7282.09,8395 7698,8395 7741.5,8438.5 7749,8446 7749,8915 7728,8936 ; v1(7487,9079) 7630,8936 7728,8936 ; C7.2 C7.2@7691.13,9036.87 ; U2.29 7722.21,9692.97 7623,9593.76 7623,9377 v1(7487,9241) C7.2@7691.13,9036.87 ; 7741.5,8922.5 7728,8936 ; U1.14 8163.31,9315.32 v1(8164,9316) ; v1(8116,9011) 7717,9011 C7.2@7691.13,9036.87 ; v1(8164,9209) 8217,9209 8313,9305 8511,9305 v1(8569,9247) ; P1.23@8980,8449.72 P1.23 ; v1(8982,8739) v1(8982,9243) ; v1(9017,9394) 9114,9297 9114,9231 D1.1
  Bottom Layer w10: v1(7487,9079) v1(7487,9241) ; v1(8116,9011) 8142,9037 8142,9187 v1(8164,9209) v1(8164,9316) ; v1(8569,9247) 8978,9247 v1(8982,9243) 9073,9334 ; P1.23 8930,8505 8930,8678 v1(8982,8739) ; v1(9017,9394) 9073,9338 9073,9334 ; P3.4 9150,9832 9150,9411 9073,9334
"OSC32 IN": C3.1 U1.8 Y1.1 | length 512
  Top Layer w10: 7695,9575 7731,9575 C3.1 7855,9630 8051.57,9433.43 U1.8
"OSC32 OUT": C5.1 U1.9 Y1.2 | length 448.1
  Top Layer w10: C5.1 7770,9500 7805.98,9535.98 Y1.2 7895,9550 8031.26,9413.74 U1.9
"OSC IN": C4.2 U1.12 Y2.2 | length 556.6
  Top Layer w10: Y2.2 7625.87,9260 C4.2 7811.18,9354.68 U1.12
"OSC OUT": C6.2 U1.13 Y2.1 | length 478.3
  Top Layer w10: C6.2 7755.87,9200.87 Y2.1 7890,9335 U1.13
PB8: R5.2 U1.95 | length 2075.8
  Top Layer w10: U1.95 8262.2,9560 8295.2,9527 v1(8489,9527) ; v1(9011,8883) 9011,8760 9066,8705 9292.97,8705 9405.11,8592.87 R5.2
  Bottom Layer w10: v1@8489,9526 8489,8989 8556,8922 8972,8922 v1(9011,8883)
PC2: P1.29 U1.17 | length 2042.5
  Top Layer w10: U1.17 8173.26,9256.26 8302.19,9385.19 v1@8572.81,9385.19 ; v1(8862,9403) 8862,9375.28 8933.14,9304.14 8933.14,8703.86 8961,8676 v1(9074,8676)
  Bottom Layer w10: v1@8572.81,9385.19 8776.19,9385.19 8794,9403 v1(8862,9403) ; v1(9074,8676) 9134,8676 9229,8581 9229,8506 P1.29
  other v1: 8572,9386
PC3: P1.25 U1.18 | length 1879.7
  Top Layer w10: U1.18 8195.57,9236.57 8304,9345 v1(8616,9345) ; v1(8918,9366) 8918,9365 8953.14,9329.86 8953.14,8717.86 8965,8706 v1(9026,8706)
  Bottom Layer w10: v1@8619,9345 8782,9345 8803,9366 v1(8918,9366) ; v1(9026,8706) 9026,8509 P1.25
PC5: P1.26 U1.34 | length 1537.4
  Top Layer w10: U1.34 8321.26,8977.74 8352,8947 v1(8352,8870) ; v1(8654,8666) 8654,8822 8653,8823 v1(8685,8870)
  Bottom Layer w10: v1(8352,8870) v1(8685,8870) ; v1(8654,8666) 8654.81,8666.81 8743.19,8666.81 8830,8580 8830,8442 8863,8409 9096.97,8409 9128,8440.03 9128,8507 P1.26
PC6: P1.19 U1.63 | length 1232.9
  Top Layer w10: U1.63 8771,9335 8850,9256 8850,8662 8879.01,8632.99 ; P1.19 8824.53,8410.47 8912.47,8410.47 8930,8428 8930,8582 8871.5,8640.5
PC7: P1.30 U1.64 | length 1263.1
  Top Layer w10: U1.64 8786.32,9354.68 8872,9269 8872,8673 8941,8604 9231,8604 P1.30
PC8: P1.31 U1.65 | length 1457.2
  Top Layer w10: U1.65 8801.63,9374.37 8893.14,9282.86 8893.14,8683.86 8953,8624 9284,8624 9332,8576 9332,8504.28 9380,8456.28 P1.31
PC9: P1.32 U1.66 | length 1384.3
  Top Layer w10: U1.66 8814.94,9394.06 8913.14,9295.86 8913.14,8692.86 8962,8644 9292.28,8644 9380,8556.28 P1.32
PC12: P1.27 U1.80 | length 1806.8
  Top Layer w10: v1(8557.48,9533.52) U1.80 ; 8587,8682.52 v1(8587,8975) ; 8589.25,8680.26 8661.02,8608.5 8705.5,8608.5 8727,8587 8727,8442 8778.53,8390.47 9130.47,8390.47 9180,8440 P1.27
  Bottom Layer w10: v1(8557.48,9533.52) 8541,9517.04 8541,9021 v1(8587,8975)
PD13: P1.20 U1.60 | length 778.3
  Top Layer w10: U1.60 8736.65,9275.94 8780,9232.6 P1.20
PD14: P1.21 U1.61 | length 944.5
  Top Layer w10: U1.61 8745.37,9295.63 8802,9239 8802,8604 8829,8577 8829,8506 P1.21
PD15: P1.22 U1.62 | length 885.2
  Top Layer w10: U1.62 8760.68,9315.32 8825,9251 8825,8610 P1.22 P1.22@8880,8567
PE0: P1.3 U1.97 | length 1282.8
  Top Layer w10: P1.3 7980,8455.94 8026,8501.94 ; 8026,8501 8026,8501.94 ; v1(8026,8958) 8026,8501.94 ; U1.97 v1@8223,9570.08
  Bottom Layer w10: v1@8030,8958 v1(8026,8958) 8026,8989.72 8100.81,9064.53 8100.81,9447.89 v1@8223,9570.08
  other v1: 8223,9568
PE1: P1.4 U1.98 | length 1718.8
  Top Layer w10: v1(7867,8947) 7838,8918 7838,8640 7876,8602 7915,8602 7962,8555 P1.4 ; v1(7999,9675) 7999,9756 8044,9801 8150.97,9801 8202.44,9749.53 ; 8198.91,9745.99 8203.15,9741.75 U1.98
  Bottom Layer w10: v1(7867,8947) 7940.75,9020.75 7940.75,9616.75 v1(7999,9675)
PE2: P1.5 U1.1 | length 1748.8
  Top Layer w10: v1(7937,8977) 7852,8977 7818,8943 7818,8429 7836.53,8410.47 8035.47,8410.47 ; 7995,8408 8033,8408 8035.47,8410.47 ; P1.5 8035.47,8410.47 ; v1(8080,9625) 8080,9595.2 U1.1@8102.76,9572.44
  Bottom Layer w10: v1(7937,8977) 7942,8977 8060.81,9095.81 8060.81,9605.81 v1(8080,9625)
PE3: P1.6 U1.2 | length 1235.4
  Top Layer w10: v1(7993,8984) 7993.81,8984.81 8041.19,8984.81 8064,8962 8064,8571 P1.6 ; U1.2 8166.54,9551.54 v1(8180,9565)
  Bottom Layer w10: v1@7992.5,8984.5 8080.81,9072.81 8080.81,9465.81 v1(8180,9565)
PE4: P1.7 U1.3 | length 1291
  Top Layer w10: U1.3 8193.15,9531.85 v1(8252,9473) ; P1.7@8171.06,8455 P1.7 8180,8480 8232,8532 8232,8618 8310,8696 8310,8843 8325.19,8858.19 8325.19,8927.73 v1(8293,8959.92)
  Bottom Layer w10: v1(8252,9473) 8252.81,9472.19 8252.81,9000.11 v1(8293,8959.92)
PE5: P1.8 U1.4 | length 1122
  Top Layer w10: U1.4 8175,9512.17 8226,9461.17 v1(8226,9436) ; P1.8 8180,8609 8290,8719 v1@8290,8921
  Bottom Layer w10: v1(8226,9436) 8226,8987 v1(8291,8922)
PE6: P1.9 U1.5 | length 1382.2
  Top Layer w10: U1.5 8160.52,9492.48 8199,9454 v1(8199,9339) ; v1@8156.45,8883 8085,8811.55 8085,8643 8132,8596 8132,8430 8132.47,8430 8152,8410.47 8240.47,8410.47 P1.9@8274,8444
  Bottom Layer w10: v1(8158,8883) 8199,8924 v1(8199,9339) ; P1.9 P1.9@8280,8471
PE7: P1.10 U1.38 | length 535.4
  Top Layer w10: P1.10 8285,8555 8400,8670 U1.38
PE8: P1.11 U1.39 | length 638.1
  Top Layer w10: P1.11@8375,8455 8330,8500 8330,8571.72 8419.37,8661.09 ; 8419.68,8661.4 U1.39
PE9: P1.12 U1.40 | length 507.3
  Top Layer w10: P1.12 8380,8575 8439.37,8634.37 U1.40
PE10: P1.13 U1.41 | length 613.4
  Top Layer w10: U1.41 8459.06,8614.06 8430,8585 8430,8500 P1.13@8475,8455
PE11: P1.14 U1.42 | length 482.2
  Top Layer w10: U1.42@8479.52,9036.98 8479.52,8555.48 P1.14
PE12: P1.15 U1.43 | length 616.5
  Top Layer w10: U1.43 8498.43,8601.57 8530,8570 8530,8505 P1.15
PE13: P1.16 U1.44 | length 508.4
  Top Layer w10: U1.44 8518.11,8621.89 8580,8560 P1.16
PE14: P1.17 U1.45 | length 641.7
  Top Layer w10: U1.45 8537.8,8667.2 8630,8575 8630,8505 P1.17
PE15: P1.18 U1.46 | length 533.5
  Top Layer w10: U1.46 8557.48,8677.52 P1.18
RX4: P4.6 U1.79 | length 772.7
  Top Layer w10: P4.6 8474,10261 8530,10205 8583.5,10205 8646.5,10142 v1@8646.5,10047 ; U1.79 8577.17,9716.17 v1(8646,9783)
  Bottom Layer w10: v1(8646,9783) v1(8646,10047)
RXD: U1.69 U4.2 | length 946.3
  Top Layer w10: U1.69 8753,9453.11 ; 8753,9453.43 8804.43,9453.43 8868,9517 8868,9695.95 8967.86,9795.81 9294.16,9795.81 9314,9775.97 9314,9748 U4.2@9281,9715
SWCLK: P3.3 U1.76 | length 1041.6
  Top Layer w10: U1.76@8637.44,9632.24 8637.44,9676.44 v1(8765,9804) ; v1(8784,10070) 8810.81,10043.19 9261.19,10043.19 P3.3
  Bottom Layer w10: v1(8765,9804) 8784,9823 v1(8784,10070)
SWDIO: P3.2 U1.72 | length 1241.1
  Top Layer w10: U1.72 8814,9512.17 8846,9544.17 8846,9702.24 8881,9737.24 v1(8881,9802) ; v1(8833,10070) 8835.55,10067.45 9191.25,10067.45 9300,10176.2 P3.2
  Bottom Layer w10: v1(8833,10070) 8833,9850 v1(8881,9802)
TX4: P4.5 U1.78 | length 722
  Top Layer w10: P4.5 8562,10254.78 8666.5,10150.28 8666.5,10088.5 v1(8678,10077) ; U1.78 8596.85,9678.85 8692,9774 v1(8692,9801)
  Bottom Layer w10: v1(8678,10077) 8678,9815 v1(8692,9801)
TXD: U1.68 U4.3 | length 809.1
  Top Layer w10: U1.68 8760,9433.43 ; 8760,9433.11 8827.11,9433.11 8888,9494 8888,9687.67 8972.33,9772 9109,9772 U4.3@9210.5,9670.5
"USB DM": R24.2 U1.70 | length 2430.9
  Top Layer w10: R24.2 7387,9270 7666,8991 7762,8991 7791,8962 v1(7791,8829) ; v1(8300,9444) 8403,9444 8431.8,9472.8 U1.70
  Bottom Layer w10: v1(7791,8829) 8264.2,8829 8339.81,8904.61 8339.81,9065.19 8300,9105 v1(8300,9444)
"USB DP": R23.2 U1.71 | length 2373.6
  Top Layer w10: R23.2 7206.87,9236 7376,9236 7656,8956 v1(7756,8956) ; v1(8285.52,9492.48) U1.71
  Bottom Layer w10: v1(7756,8956) 7863,8849 8255.92,8849 8319.81,8912.89 8319.81,9052.19 8273,9099 8273,9420.59 8273.19,9420.78 8273.19,9432.89 8273.19,9455.11 8285.52,9467.44 v1(8285.52,9492.48)
pads on no net: CN1.0 CN1.7 K1.1 K1.4 K1.5 K1.6 U1.7 U1.15 U1.23 U1.26 U1.29 U1.33 U1.35 U1.36 U1.47 U1.77 U1.83 U1.84 U1.85 U1.89 U1.90 U1.91 U2.1 U2.5 U2.6 U2.8 U2.9 U2.10 U2.11 U2.12 U2.25 U2.33 U2.38 U2.41 U2.42 U2.45 U2.46 U4.9 U4.10 U4.11 U4.12 U4.15 U7.5 U10.0 U11.4 U11.6 U11.7 U11.8 U11.9 Y3.1

## Polygon pours and split planes (outlines as drawn)
GND on Bottom Layer "Bottom Layer-No Net" (hatched 90Degree grid 10 track 8, remove dead copper, pour order 4): 6384,10346 9533.61,10346 9533.61,8310 6384,8310
GND on Top Layer "Bottom Layer-No Net" (hatched 90Degree grid 10 track 8, remove dead copper, pour order 3): 6376,10358 9525.61,10358 9525.61,8322 6376,8322

## Keep-outs
Keep-Out Layer:
  lines w8: 6376,10358 6376,8322 9525.61,8322 9525.61,10358 ; 6376,10361 9525.61,10361

## Other copper
Top Layer:
  pour cut-out: 9325,10090 9343.52,10071.48 9343.52,9981.16 9304.16,9981.16 9293,9970
  pour cut-out: 7735,9060 7736,9060 7743,9053 7743,9038 7730.31,9038 7728.31,9040
  pour cut-out: 6670,8384 6664,8378 6664,8293 6748,8293 6760,8281 6765,8286 6765,8381

## Text inside footprints (layer, text, board x,y; h text height)
P1: Top Overlay "31" at 9369,8378 h25; Top Overlay "32" at 9353,8619 h25